# Altium PCB DC_Motor_Driver_V1.0.0.PcbDoc
Units mil, origin at the board's own origin, x right, y up, seen from the top; angles counter-clockwise.
Board outline 6000 x 4000 mil, 2 copper layers (Top Layer, Bottom Layer); 11 components, 14 nets, 48 pads, 11 vias.
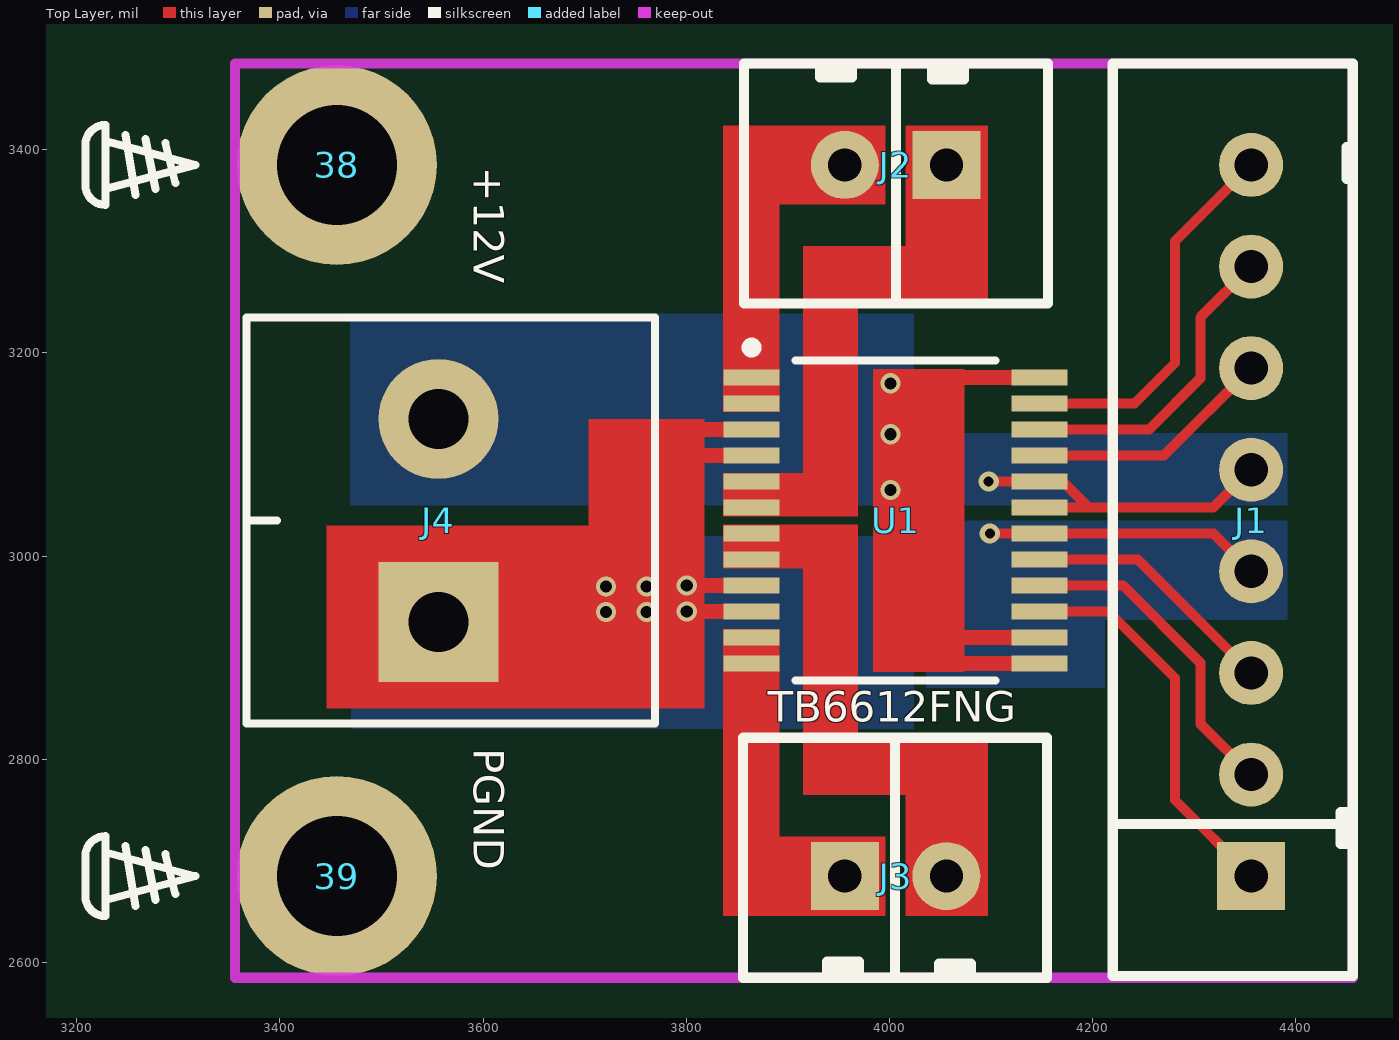
[diagram p0: Top Layer view]
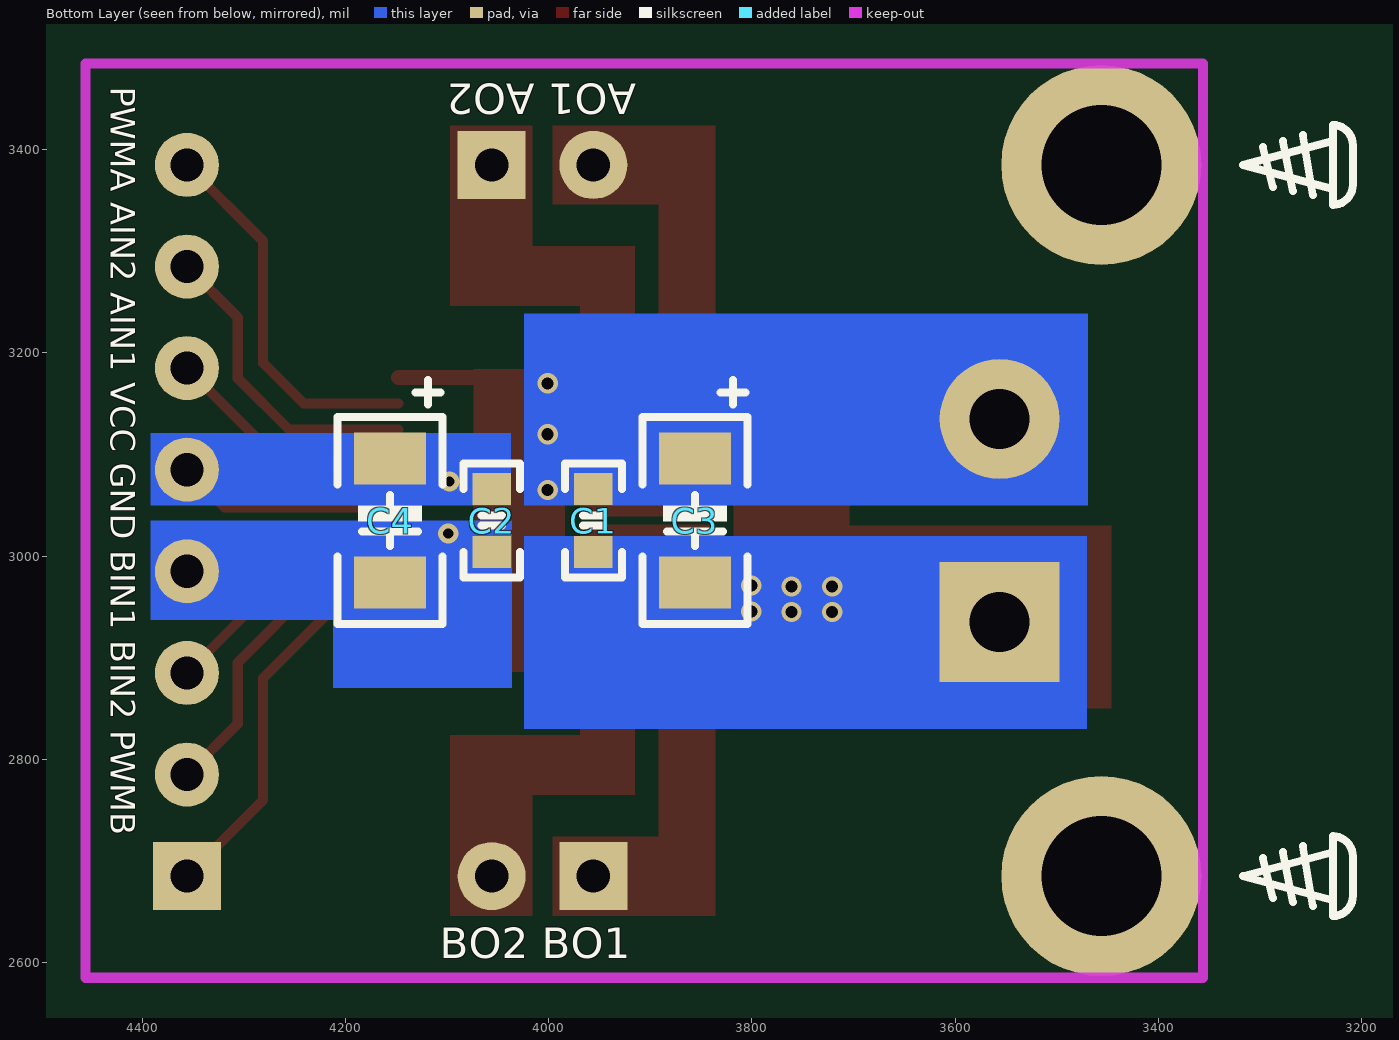
[diagram p1: Bottom Layer view, seen from below]
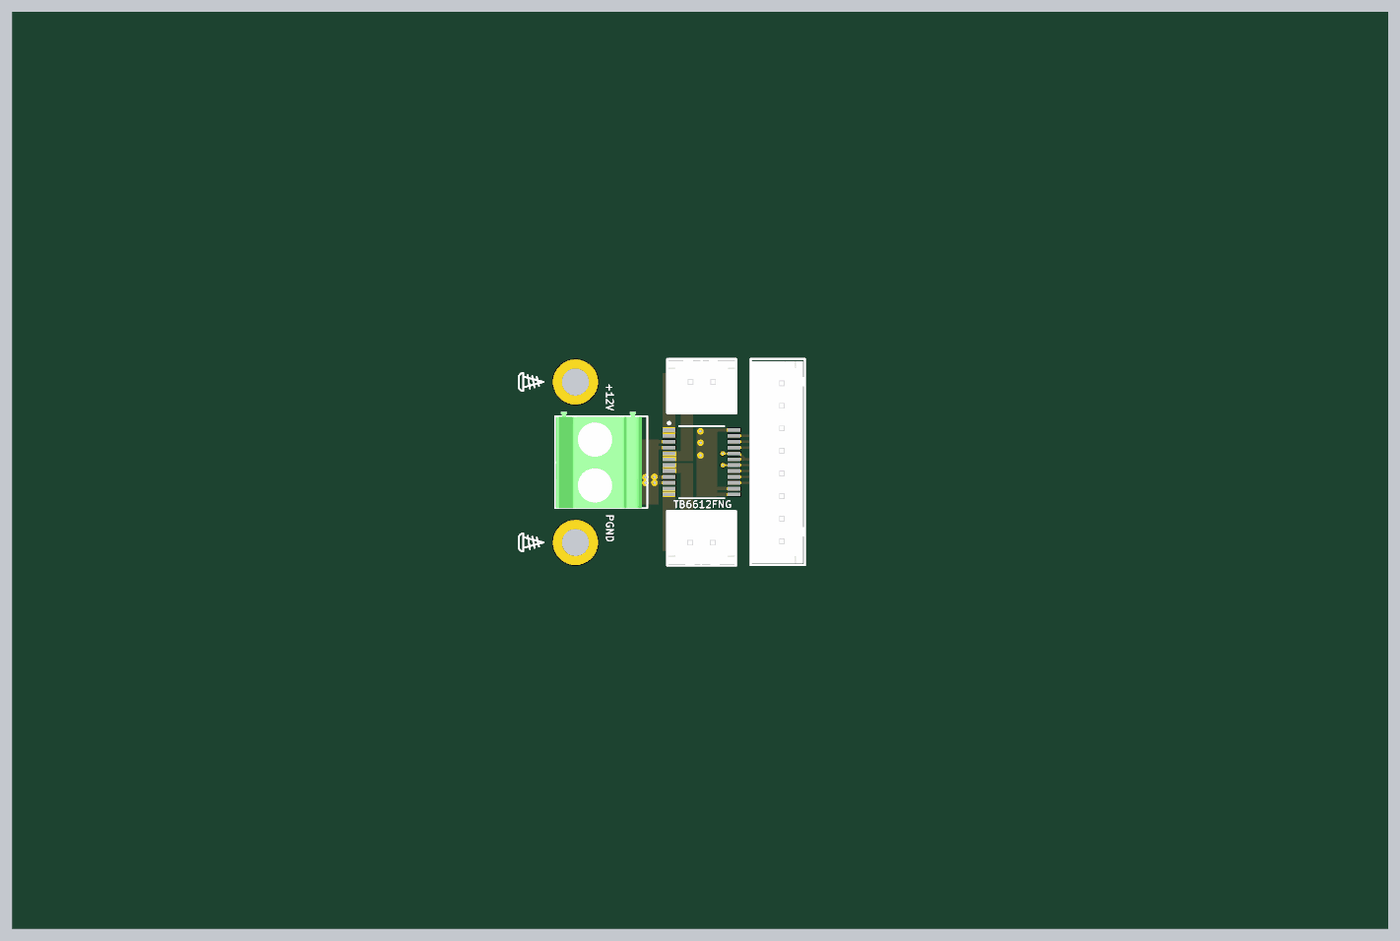
[diagram p2: 3D render of the assembled board from above, using the file's embedded part models]
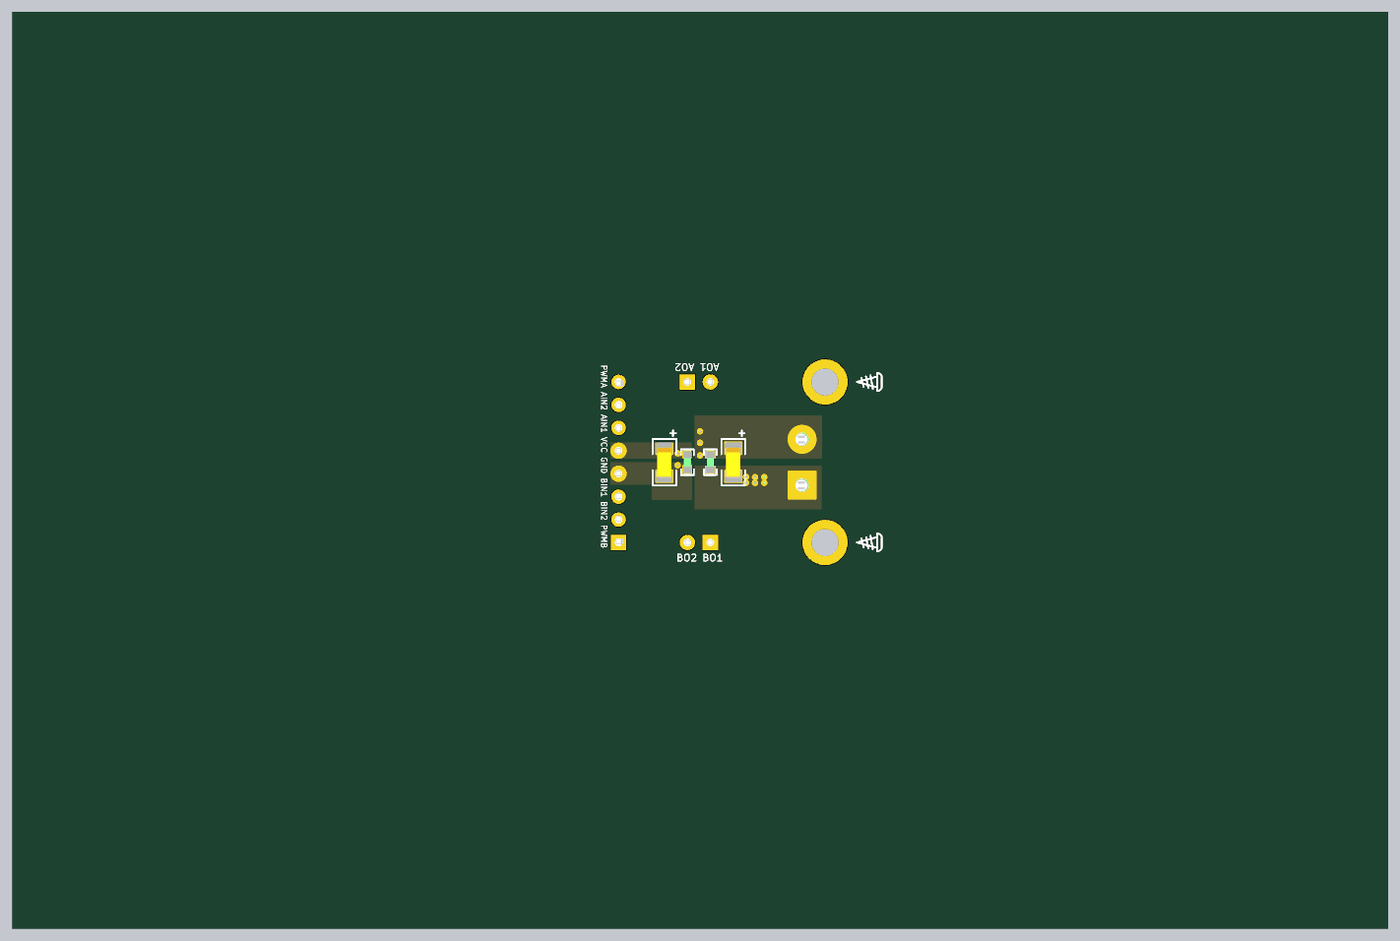
[diagram p3: 3D render of the assembled board from below, using the file's embedded part models]

## Layer stack, top to bottom
Top Solder: solder mask 0.4, Solder Resist, Dk 3.5
Top Layer: signal copper 1.4
Dielectric 1: dielectric 12.6, FR-4, Dk 4.8
Bottom Layer: signal copper 1.4
Bottom Solder: solder mask 0.4, Solder Resist, Dk 3.5

## Board outline
1000,1000 7000,1000 7000,5000 1000,5000

## Design rules (kind name [scope] priority, off if disabled: settings)
Clearance [All] p1: gap=6
PolygonConnect [All] p1: connectstyle=Relief reliefconductorwidth=10 reliefentries=4 polygonreliefangle="90 Angle" airgapwidth=10
RoutingVias [All] p1: holewidth=10 width=20 viastyle="Through Hole" minholewidth=10 minwidth=20 maxholewidth=28 maxwidth=50
SolderMaskExpansion [All] p1: expansion=4
Width [All] p1: maxlimit=50 minlimit=6 preferedwidth=10
30 further rules are at their usual default settings.

## Classes and differential pairs
component class tb6612fng: C1 C2 C3 C4 J1 J2 J3 J4 U1

## Components (designator, comment, footprint, x,y, rotation, side; value= is the part's Value field where it differs from the comment)
38 "Comment" "Screw Hole" 3456,3385 r90 top
39 "Comment" "Screw Hole" 3456,2685 r90 top
C1 "Cap" C_0603 3956,3035 r90 bottom
C2 "Cap" C_0603 4056,3035 r90 bottom
C3 "Cap Pol1" TAC_3216 3856,3035 r270 bottom
C4 "Cap Pol1" TAC_3216 4156,3035 r270 bottom
J1 "CON8" XH2.54-8P 4356,2685 r90 top
J2 "CON2" XH2.54-2P 4056,3385 r180 top
J3 "CON2" XH2.54-2P 3956,2685 r0 top
J4 "CON2" WJ500V-5.08-2 3556,3035 r90 top
U1 "TB6612FNG" SSOP24 4006,3035 r0 top

## Footprints (in the part's own frame and the unit in brackets; to place one, negate y for a bottom-side part, rotate by r counter-clockwise, add the part's x,y. Pads: shape width x height; smd on the part's side, far side on the other; paste and mask are expansions set on the pad)
C_0603 [mm]
  rect 0.8x0.96 smd: 1(-0.79,0) 2(0.79,0)
  silkscreen extent -1.42,-0.71 1.42,0.71, body extent -0.76,-0.39 0.76,0.39, height 0.9
"Screw Hole" [mm]
  round 5 hole 3: 1(0,0)
  silkscreen extent -1,3.54 1,6.29, body extent -2.6,-2.6 2.6,2.6, height 2.55
SSOP24 [mm] "TSOP, 24-Leads, Body 7.80x5.60mm, Pitch 0.65mm, Thermal Pad 6.30x4.30mm, IPC Medium Density"
  rect 1.4x0.4 smd: 1(-3.6,3.575) 2(-3.6,2.925) 3(-3.6,2.275) 4(-3.6,1.625) 5(-3.6,0.975) 6(-3.6,0.325) 7(-3.6,-0.325) 8(-3.6,-0.975) 9(-3.6,-1.625) 10(-3.6,-2.275) 11(-3.6,-2.925) 12(-3.6,-3.575) 13(3.6,-3.575) 14(3.6,-2.925) 15(3.6,-2.275) 16(3.6,-1.625) 17(3.6,-0.975) 18(3.6,-0.325) 19(3.6,0.325) 20(3.6,0.975) 21(3.6,1.625) 22(3.6,2.275) 23(3.6,2.925) 24(3.6,3.575)
  silkscreen extent -3.72,-4 2.5,4.45, body extent -2.9,-4 2.9,4, height 1.6
TAC_3216 [mm]
  rect 1.3x1.8 smd: 1(-1.55,0) 2(1.55,0)
  silkscreen extent -3.52,-1.31 2.59,1.31, body extent -1.75,-0.8 1.75,0.8, height 1.6
WJ500V-5.08-2 [mm]
  rect 3x3 hole 1.5: 1(-2.54,0)
  round 3 hole 1.5: 2(2.54,0)
  silkscreen extent -5.08,-5.41 5.08,4.8, body extent -5.11,-4.83 5.62,4.67, height 15
XH2.54-2P [mm]
  rect 1.7x1.7 hole 0.83: 1(0,0)
  round 1.7 hole 0.83: 2(2.54,0)
  silkscreen extent -2.54,-2.54 5.06,3.46, body extent -2.45,-2.37 4.95,3.38, height 7
XH2.54-8P [mm]
  rect 1.7x1.7 hole 0.83: 1(0,0)
  round 1.6 hole 0.83: 2(2.54,0) 3(5.08,0) 4(7.62,0) 5(10.16,0) 6(12.7,0) 7(15.24,0) 8(17.78,0)
  silkscreen extent -2.5,-2.54 20.32,3.46, body extent -2.31,-2.35 20.09,3.4, height 7

## Part data
C1 C2: "Capacitor"
C3 C4: "Polarized Capacitor (Radial)"
J1 J2 J3 J4: "连接器"
U1: "DC_MOTOR_DRIVER"

## Via types
v1: diameter 20, hole 12, Top Layer to Bottom Layer, 9 vias
v2: diameter 20, hole 10, Top Layer to Bottom Layer, 2 vias

## Nets (pads, with @x,y where several pads share a name; then routed paths per layer and width w, separated by ;. In a path a pad name is that pad's centre, name@x,y a point inside that pad or via, vN(x,y) a via of type N, cw(c..) or ccw(c..) an arc to the next point about the centre after c; other vN are vias at no path point)
12V: C1.2 C3.1 J4.2 U1.13 U1.14 U1.24 | length 731.9
  Top Layer w15: 4064.25,2894.25 U1.13 ; 4064.25,2919.84 U1.14 ; 4064.25,3175.75 U1.24
  Bottom Layer w30: C3.1 3885.94,3066.1 C1.2 v1@4008.9,3066.1
  Bottom Layer w50: J4.2 3594.96,3096.04 C3.1
  other v1: 4001,3065 4001,3120 4001,3170
AIN1: J1.6 U1.21 | length 243.9
  Top Layer w10: U1.21 4269.98,3098.98 J1.6
AIN2: J1.7 U1.22 | length 309.9
  Top Layer w10: U1.22 4255.57,3124.57 4306,3175 4306,3235 J1.7
BIN1: J1.3 U1.17 | length 254.5
  Top Layer w10: U1.17 4244.39,2996.61 J1.3
BIN2: J1.2 U1.16 | length 320.5
  Top Layer w10: U1.16 4229.98,2971.02 4306,2895 4306,2835 J1.2
GND: C2.1 C4.2 J1.4 U1.18 | length 400.2
  Top Layer w10: v2(4098.8,3022.2) U1.18 4318.8,3022.2 J1.4
  Bottom Layer w10: C2.1 4074.31,3022.2 v2(4098.8,3022.2) 4147.04,2973.96 C4.2
NetJ2_1: J2.1 U1.5 U1.6
NetJ2_2: J2.2 U1.1 U1.2
NetJ3_1: J3.1 U1.11 U1.12
NetJ3_2: J3.2 U1.7 U1.8
PGND: C1.1 C3.2 J4.1 U1.3 U1.4 U1.9 U1.10 | length 683.9
  Top Layer w15: v1(3800.43,2945.43) U1.10 ; v1(3800.43,2971.02) U1.9 ; 3800.43,3098.98 U1.4 ; 3800.43,3124.57 U1.3
  Bottom Layer w30: C3.2 3885.94,3003.9 C1.1
  Bottom Layer w50: J4.1 3594.96,2973.96 C3.2
  other v1: 3721,2945 3761,2945 3721,2970 3761,2970
PWMA: J1.8 U1.23 | length 375.8
  Top Layer w10: U1.23 4241.16,3150.16 4281,3190 4281,3310 J1.8
PWMB: J1.1 U1.15 | length 386.4
  Top Layer w10: U1.15 4215.57,2945.43 4281,2880 4281,2760 J1.1
VCC: C2.2 C4.1 J1.5 U1.19 U1.20 | length 445.1
  Top Layer w10: v2(4097.61,3073.39) U1.20 4170.41,3073.39 4196,3047.8 ; U1.19 4196,3047.8 ; J1.5 4318.8,3047.8 4196,3047.8
  Bottom Layer w10: C2.2 4063.28,3073.39 v2(4097.61,3073.39) 4133.35,3073.39 C4.1
pads on no net: 38.1 39.1

## Keep-outs
Keep-Out Layer:
  lines w10: 3356,2585 3356,3485 4456,3485 4456,2585 3356,2585

## Other copper
Top Layer:
  rectangle net PGND: 3446,2850 3704,3030
  rectangle net 12V: 3984,2886 4074,3184
  rectangle net PGND: 3704,2850 3818,3135
  rectangle net NetJ2_1: 3836,3039 3969,3082
  rectangle net NetJ2_1: 3915,3039 3969,3287
  rectangle net NetJ2_1: 3915,3246 4097,3305
  rectangle net NetJ2_1: 4016,3246 4097,3424
  rectangle net NetJ2_2: 3836,3142 3892,3424
  rectangle net NetJ2_2: 3836,3346 3996,3424
  rectangle net NetJ3_1: 3836,2646 3892,2928
  rectangle net NetJ3_1: 3836,2646 3996,2724
  rectangle net NetJ3_2: 3836,2988 3969,3031
  rectangle net NetJ3_2: 3915,2783 3969,3031
  rectangle net NetJ3_2: 3915,2765 4097,2824
  rectangle net NetJ3_2: 4016,2646 4097,2824
Bottom Layer:
  rectangle net VCC: 4037,3050 4392,3121
  rectangle net GND: 4036,2870 4212,3020
  rectangle net GND: 4036,2937 4392,3035
  rectangle net PGND: 3470,2830 4024,3020
  rectangle net 12V: 3469,3050 4024,3239

## Silkscreen, mask and mechanical layers (free items; w line width, h text height)
Top Overlay:
  text "+12V" at 3591,3383 h30 r270
  text "PGND" at 3591,2811 h30 r270
Bottom Overlay:
  text "AO1 AO2" at 3914,3465 h30 r180
  text "PWMA AIN2 AIN1 VCC GND BIN1 BIN2 PWMB" at 4431,3462 h24 r90
  text "BO2 BO1" at 4107,2604 h30